# Altium PCB JacdacG0Button 40.PcbDoc
Units mm, origin at the board's own origin, x right, y up, seen from the top; angles counter-clockwise.
Board outline 12.5 x 25.85 mm, 2 copper layers (Top Layer, Bottom Layer), stack 1.525 mm thick; 22 components, 14 nets, 66 pads, 17 vias.
Unrouted connection lines stored in the file: 14.
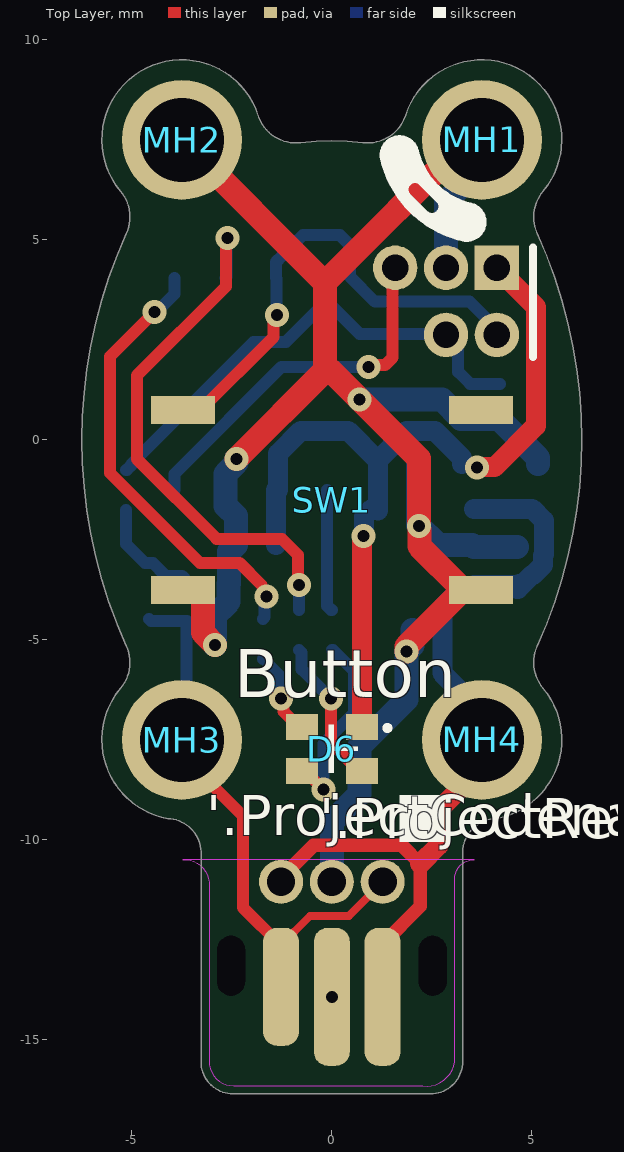
[diagram p0: Top Layer view]
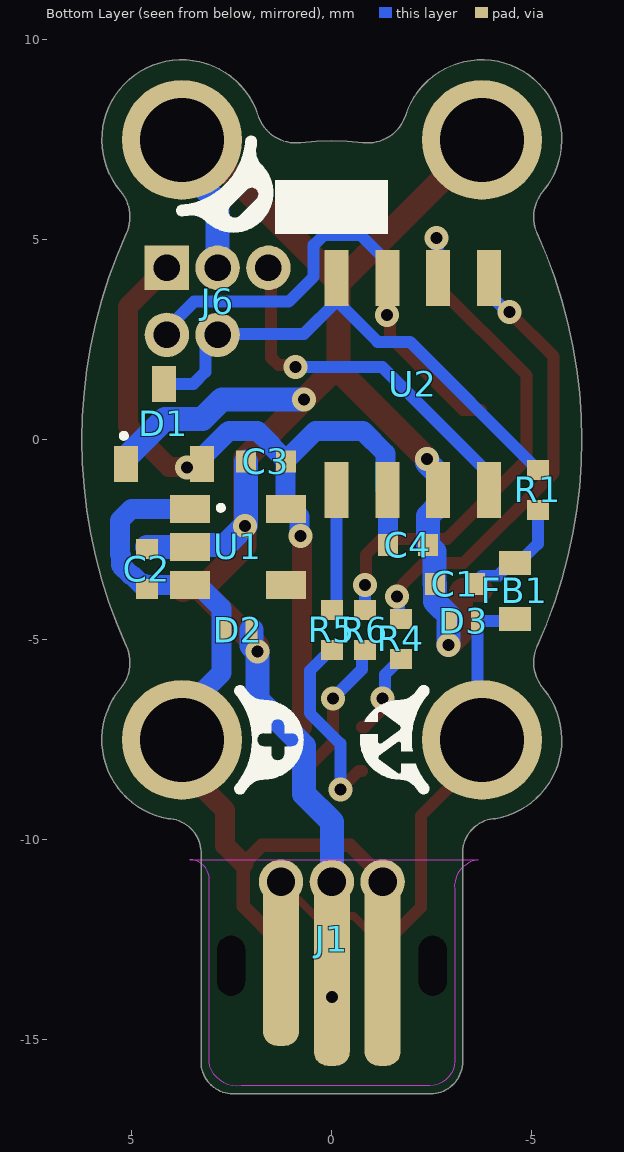
[diagram p1: Bottom Layer view, seen from below]

## Layer stack, top to bottom
Top Solder: solder mask 0.0102, Solder Resist, Dk 3.5
Top Layer: signal copper 0.0356
Dielectric 1: core 1.454, FR-4, Dk 4.2
Bottom Layer: signal copper 0.0356
Bottom Solder: solder mask 0.0102, Solder Resist, Dk 3.5

## Board outline
-3.27,-15.55 -3.27,-10.372 ccw(c-4.134,-10.334) -4.097,-9.47 cw(c-3.75,-7.5) -5.75,-7.5 -5.75,-7.471 cw(c-3.75,-7.5) -5.282,-6.214 ccw(c-6.047,-5.57) -5.136,-5.158 cw(c6.247,-0.001) -5.136,5.157 ccw(c-6.047,5.569) -5.281,6.212 cw(c-3.749,7.499) -1.845,8.113 ccw(c-0.893,8.42) -0.777,7.426 cw(c0.001,0.752) 0.778,7.426 ccw(c0.893,8.42) 1.845,8.113 cw(c3.749,7.499) 5.282,6.213 ccw(c6.047,5.57) 5.137,5.157 cw(c-6.25,0) 5.136,-5.158 ccw(c6.047,-5.571) 5.281,-6.214 cw(c3.75,-7.5) 4.097,-9.47 ccw(c4.134,-10.334) 3.27,-10.372 3.27,-15.55 cw(c2.471,-15.551) 2.47,-16.35 -2.47,-16.35 cw(c-2.471,-15.551)

## Design rules (kind name [scope] priority, off if disabled: settings)
AssemblyTestPointUsage [All] p1: valid=2
BoardOutlineClearance [All] p1: gap=0.3 ignorepadtopadclearanceinfootprint=FALSE except(0: Arc-SplitContinuation Track-SplitContinuation SMDPad-SplitContinuation THPad-SplitContinuation Via-SplitContinuation Fill-SplitContinuation Poly-SplitContinuation Region-OutlineEdge Region-SplitContinuation Text-OutlineEdge Text-SplitContinuation)
Clearance [All] p1: gap=0.125 ignorepadtopadclearanceinfootprint=FALSE except(0: Arc-Hole Track-Hole SMDPad-Hole THPad-Hole Via-Hole Fill-Hole Poly-Hole Region-Hole Text-Hole)
ComponentClearance [All] p1: gap=0.2 collisioncheckmode=3 verticalgap=0.2 showdistances=FALSE
DiffPairsRouting [All] p1: maxlimit=2 minlimit=0.15 mostfreqgap=0.15 toplayer_minwidth=0.15 toplayer_maxwidth=2 toplayer_prefwidth=0.15 bottomlayer_minwidth=0.15 bottomlayer_maxwidth=2 bottomlayer_prefwidth=0.15 substack1={CB9D278B-8BF5-444A-AAF4-837A2A9DF42D} toplayer_{cb9d278b-8bf5-444a-aaf4-837a2a9df42d}_minwidth=0.381 toplayer_{cb9d278b-8bf5-444a-aaf4-837a2a9df42d}_maxwidth=0.381 toplayer_{cb9d278b-8bf5-444a-aaf4-837a2a9df42d}_prefwidth=0.381 bottomlayer_{cb9d278b-8bf5-444a-aaf4-837a2a9df42d}_minwidth=0.381 bottomlayer_{cb9d278b-8bf5-444a-aaf4-837a2a9df42d}_maxwidth=0.381 bottomlayer_{cb9d278b-8bf5-444a-aaf4-837a2a9df42d}_prefwidth=0.381 substack2={826B8647-A721-4255-895A-19F9591B9CD1} toplayer_{826b8647-a721-4255-895a-19f9591b9cd1}_minwidth=0.381 toplayer_{826b8647-a721-4255-895a-19f9591b9cd1}_maxwidth=0.381 toplayer_{826b8647-a721-4255-895a-19f9591b9cd1}_prefwidth=0.381 bottomlayer_{826b8647-a721-4255-895a-19f9591b9cd1}_minwidth=0.381 bottomlayer_{826b8647-a721-4255-895a-19f9591b9cd1}_maxwidth=0.381 bottomlayer_{826b8647-a721-4255-895a-19f9591b9cd1}_prefwidth=0.381 substack3={E64FCAF4-1BC8-437D-B1E0-0E5F2DC0F59E} toplayer_{e64fcaf4-1bc8-437d-b1e0-0e5f2dc0f59e}_minwidth=0.381 toplayer_{e64fcaf4-1bc8-437d-b1e0-0e5f2dc0f59e}_maxwidth=0.381 toplayer_{e64fcaf4-1bc8-437d-b1e0-0e5f2dc0f59e}_prefwidth=0.381 bottomlayer_{e64fcaf4-1bc8-437d-b1e0-0e5f2dc0f59e}_minwidth=0.381 bottomlayer_{e64fcaf4-1bc8-437d-b1e0-0e5f2dc0f59e}_maxwidth=0.381 bottomlayer_{e64fcaf4-1bc8-437d-b1e0-0e5f2dc0f59e}_prefwidth=0.381 substack4={E61CE66C-507C-4E1E-8E83-C905434AFC1C} toplayer_{e61ce66c-507c-4e1e-8e83-c905434afc1c}_minwidth=0.381 toplayer_{e61ce66c-507c-4e1e-8e83-c905434afc1c}_maxwidth=0.381 toplayer_{e61ce66c-507c-4e1e-8e83-c905434afc1c}_prefwidth=0.381 bottomlayer_{e61ce66c-507c-4e1e-8e83-c905434afc1c}_minwidth=0.381 bottomlayer_{e61ce66c-507c-4e1e-8e83-c905434afc1c}_maxwidth=0.381 bottomlayer_{e61ce66c-507c-4e1e-8e83-c905434afc1c}_prefwidth=0.381 maxuncoupledlength=25
FabricationTestPointUsage [All] p1: valid=2 allowmultiple=FALSE
HoleSize [All] p1: absolutevalues=TRUE maxlimit=2.54 minlimit=0.2 maxpercent=80.000 minpercent=20.000
MinimumSolderMaskSliver [All] p1: minsoldermaskwidth=0.005
PlaneClearance [All] p1: clearance=0.3
PlaneConnect [All] p1: planeconnectstyle=Relief reliefexpansion=0.5 reliefentries=4 reliefconductorwidth=0.2 reliefairgap=0.3
PolygonConnect "PolygonConnect GND" [isVIA] p1: connectstyle=Relief reliefconductorwidth=0.2 reliefentries=4 polygonreliefangle="90 Angle" airgapwidth=0.2
PolygonConnect [All] p2: connectstyle=Relief reliefconductorwidth=0.2 reliefentries=4 polygonreliefangle="90 Angle" airgapwidth=0.2
RoutingVias [All] p1: holewidth=0.3 width=0.6 viastyle="Through Hole" minholewidth=0.3 minwidth=0.6 maxholewidth=0.3 maxwidth=0.8
SilkToSilkClearance [All] p1: silktosilkclearance=0.001
SilkToSolderMaskClearance [IsPad] p1: minsilkscreentomaskgap=0.05 clearancetoexposedcopper=TRUE
SolderMaskExpansion [All] p1: expansion=0.075 istentingtop=FALSE
Width [All] p1: maxlimit=2 minlimit=0.15 preferedwidth=0.15 substack1={CB9D278B-8BF5-444A-AAF4-837A2A9DF42D} substack2={826B8647-A721-4255-895A-19F9591B9CD1} substack3={E64FCAF4-1BC8-437D-B1E0-0E5F2DC0F59E} substack4={E61CE66C-507C-4E1E-8E83-C905434AFC1C} minimp=50.000000 maximp=50.000000 favimp=50.000000
20 further rules are at their usual default settings.

## Components (designator, comment, footprint, x,y, rotation, side; value= is the part's Value field where it differs from the comment)
C1 "CL05C330JB5NNNC" "C0402_0.55MM - without outline" -3.077,-3.6 r180 bottom
C2 "CL05A105KP5NNNC" "C0402_0.55MM - without outline" 4.625,-3.23 r270 bottom
C3 "CL05A105KP5NNNC" "C0402_0.55MM - without outline" 1.651,-0.541 r180 bottom
C4 "CL05A105KP5NNNC" "C0402_0.55MM - without outline" -1.9,-2.625 r0 bottom
D1 "BAT54S" "NXP-BAT54S-TO-236AB - WITHOUT OUTLINE" 4.2,0.4 r90 bottom
D2 "RCLAMP0521P-N" "TVS 0402 - without outline" 2.339,-4.75 r180 bottom
D3 "RCLAMP0521P-N" "TVS 0402 - without outline" -3.3,-4.525 r0 bottom
D6 "TZ-P4-1615RGBTCA1-0.55T" TZ-P4-1615RGBTCA1-0.55T 0,-7.725 r180 top
FB1 "TDK MPZ1608S102ATA00" "TDK MPZ1608 0.8mm - without outline" -4.575,-3.775 r90 bottom
J1 "Jacdac edge connector" JACDAC_EDGE_CONNECTOR_0.2mm_T&G 0,-10.5 r0 bottom
J6 "Hack Connect Mini 1.27 mm pitch 2-row" HACK_CONNECT_MINI_5_X_1_27 4.125,4.3 r270 bottom
MH1 "MH_5.0MMK_3.0MMC_2.1MMD_PTH" MH_5.0MMK_3.0MMC_2.1MMD_PTH 3.75,7.5 r180 top
MH2 "MH_5.0MMK_3.0MMC_2.1MMD_PTH" MH_5.0MMK_3.0MMC_2.1MMD_PTH -3.75,7.5 r0 top
MH3 "MH_5.0MMK_3.0MMC_2.1MMD_PTH" MH_5.0MMK_3.0MMC_2.1MMD_PTH -3.75,-7.5 r0 top
MH4 "MH_5.0MMK_3.0MMC_2.1MMD_PTH" MH_5.0MMK_3.0MMC_2.1MMD_PTH 3.75,-7.5 r0 top
R1 "RC0402FR-07220RL" "R0402 - Without outline" -5.15,-1.25 r270 bottom
R4 "RC0402FR-0730RL" "R0402 - Without outline" -1.725,-4.975 r90 bottom
R5 "RC0402FR-0730RL" "R0402 - Without outline" 0,-4.75 r90 bottom
R6 "RC0402FR-07150RL" "R0402 - Without outline" -0.825,-4.75 r90 bottom
SW1 "Tact Wurth 430152050826" "Wurth 430152050836 - medium" 0,-1.5 r0 top
U1 "LDO 3.3V/300 mA" "ON_SEMI-SOT23-5 - WITHOUT OUTLINE" 2.35,-2.675 r180 bottom
U2 "STM32G031J6M6" 8-SOIC -2.025,1.4 r90 bottom

## Footprints (in the part's own frame and the unit in brackets; to place one, negate y for a bottom-side part, rotate by r counter-clockwise, add the part's x,y. Pads: shape width x height; smd on the part's side, far side on the other; paste and mask are expansions set on the pad)
8-SOIC [mm] "8-SOIC (0.154\", 3.90mm Width)"
  rect 1.4x0.6 smd: 1(-2.65,1.905) 2(-2.65,0.635) 3(-2.65,-0.635) 4(-2.65,-1.905) 5(2.65,-1.905) 6(2.65,-0.635) 7(2.65,0.635) 8(2.65,1.905)
  body extent -2.96,-2.51 2.96,2.51, height 1.75
"C0402_0.55MM - without outline" [mm]
  rect 0.5x0.55 smd: 1(-0.5,0) 2(0.5,0)
  body extent -0.5,-0.25 0.5,0.25, height 0.55
HACK_CONNECT_MINI_5_X_1_27 [mm]
  rect 1.11x1.11 hole 0.66: 1(0,0)
  round 1.11 hole 0.66: 2(1.676,0) 3(0,1.27) 4(1.676,1.27) 5(0,2.54)
JACDAC_EDGE_CONNECTOR_0.2mm_T&G [mm] "JacDac 3 pin connector with traces for 0.2mm T&G"
  rrect78% 0.9x2.95 smd far side paste-1 mask+0: 1(-1.27,3.175)
  round 1.11 / inner round 0.71 / far side round 1.1 hole 0.71 paste-0.254 mask+0: 1(1.27,0.55) 2(0,0.55) 3(-1.27,0.55)
  rrect78% 0.9x4.3 smd paste-1 mask+0: 1(1.27,2.5)
  rrect78% 0.9x4.8 smd paste-1 mask+0: 2(0,2.75) 3(-1.27,2.75)
  rrect78% 0.9x3.45 smd far side paste-1 mask+0: 2(0,3.425) 3(1.27,3.425)
  round 0 hole 0.7 slot 1.5 at 90 deg unplated: ""(-2.52,2.65) ""(2.52,2.65)
  Top Layer keep-out region: -3.663,0 -3.413,0.079 -3.213,0.248 -3.092,0.48 -3.07,0.741 -3.07,0.741 -3.07,5.033 -2.987,5.341 -2.761,5.567 -2.453,5.65 -2.453,5.65 2.27,5.65 2.545,5.635 2.794,5.516 2.978,5.31 3.07,5.05 3.07,5.05 3.061,0.495 3.098,0.306 3.206,0.145 3.366,0.038 3.556,0 3.556,0
  Top Layer keep-out region: -3.663,0 -3.413,0.079 -3.213,0.248 -3.092,0.48 -3.07,0.741 -3.07,0.741 -3.07,5.033 -2.987,5.341 -2.761,5.567 -2.453,5.65 -2.453,5.65 2.27,5.65 2.545,5.635 2.794,5.516 2.978,5.31 3.07,5.05 3.07,5.05 3.061,0.495 3.098,0.306 3.206,0.145 3.366,0.038 3.556,0 3.556,0
  Bottom Layer lines w0.2: -1.307,2.167 -1.28,2.14 -0.54,1.4 0.426,1.4 1.126,0.7 ; -1.27,0.85 -1.126,0.85 ; -1.067,2.153 -1.067,2.077
  Bottom Layer lines w0.34: -1.27,0.454 -0.457,-0.359 1.753,-0.359 2.21,0.098 2.21,1.165 1.283,2.092
  Bottom Layer keep-out region: -3.731,0 -3.494,0.027 -3.285,0.142 -3.136,0.329 -3.07,0.559 -3.07,0.559 -3.07,5.033 -3.023,5.269 -2.889,5.469 -2.689,5.603 -2.453,5.65 -2.453,5.65 2.27,5.65 2.545,5.635 2.794,5.516 2.978,5.31 3.07,5.05 3.07,5.05 3.07,0.487 3.107,0.301 3.213,0.143 3.371,0.037 3.557,0 3.557,0
MH_5.0MMK_3.0MMC_2.1MMD_PTH [mm] "Mounting Hole 5.0mm clearance, 3.1 annualar ring and 2.1mm PTH"
  round 3 hole 2.1 mask+0.05: 1(0,0)
"NXP-BAT54S-TO-236AB - WITHOUT OUTLINE" [mm] "SOT23, 3-Leads, Body 2.90x2.30mm, Pitch 0.95mm, IPC Medium Density"
  rect 0.9x0.6 smd: 1(-1,0.95) 2(-1,-0.95) 3(1,0)
  silkscreen extent -0.35,0.95 -0.25,1.05, body extent -1.32,-1.5 1.32,1.5, height 1.12
"ON_SEMI-SOT23-5 - WITHOUT OUTLINE" [mm]
  rect 1x0.7 smd: 1(-1.2,0.95) 2(-1.2,0) 3(-1.2,-0.95) 4(1.2,-0.95) 5(1.2,0.95)
  silkscreen extent -0.48,0.93 -0.38,1.02, body extent -1.5,-1.57 1.5,1.58, height 1.1
"R0402 - Without outline" [mm]
  rect 0.5x0.55 smd: 1(-0.5,0) 2(0.5,0)
  body extent -0.5,-0.25 0.5,0.25, height 0.35
"TDK MPZ1608 0.8mm - without outline" [mm]
  rect 0.6x0.8 smd paste-0.1: 1(-0.7,0) 2(0.7,0)
  body extent -0.8,-0.4 0.8,0.4, height 0.8
"TVS 0402 - without outline" [mm] "TVS 0402 RoHS"
  rect 0.3x0.55 smd mask+0.05: 1(-0.325,0) 2(0.325,0)
  body extent -0.5,-0.3 0.5,0.3, height 0.5
TZ-P4-1615RGBTCA1-0.55T [mm] "1615 Light Emitting Diodes (LED) RoHS"
  rect 0.8x0.65 smd mask+0.05: 1(-0.75,-0.55) 2(-0.75,0.55) 3(0.75,0.55) 4(0.75,-0.55)
  silkscreen extent -1.44,-0.6 0.07,0.6, body extent -0.8,-0.75 0.8,0.75, height 0.55
"Wurth 430152050836 - medium" [mm] "6*6mm vertical type, SMD, height 5.0mm, black actuator, 160gf, T&R"
  rect 1.6x0.7 smd: 1(-3.725,2.25) 2(-3.725,-2.25) 3(3.725,2.25) 4(3.725,-2.25)
  body extent -4.5,-3.1 4.5,3.1, height 4.99

## Part data
C1: "CAP CER 33PF 50V C0G/NP0 0402", Capacitance=33pF, Case Code (Imperial)=0402, Case Code (Metric)=1005, Dielectric=C0G, Manufacturer=Samsung, Max Operating Temperature=125°C, Min Operating Temperature=-55°C, Package Quantity=1, Supplier Part Number 1=1276-1272-1-ND, Temperature Coefficient=300ppm/°C, Tolerance=5%, Voltage=50V, Case/Package=0402, Category="Ceramic Capacitors", ComponentLink1Description="Online datasheet", ComponentLink1URL=https://datasheet.ciiva.com/15195/getdatasheetpartid-355282-15195687.pdf, Construction=Flat, Contact Plating=Tin, Depth=0.5mm, Height=0.5mm, Lead Free="Lead Free", Length=1mm, Manufacturer Part Number=CL05C330JB5NNNC, Material=Ceramic, Mount="Surface Mount", Packaging="Tape and Reel", Pricing 1="1=0.10000, 10=0.02300, 50=0.01260, 100=0.01040, 500=0.00740, 1000=0.00582, 2500=0.00529, 5000=0.00487 (USD)", Pricing 2="1=0.12500, 25=0.02900, 100=0.01300, 250=0.01100, 500=0.00900, 1000=0.00600 (USD)", Pricing 3="1=0.10000, 10=0.01400, 50=0.01400, 100=0.01100, 1000=0.00600, 10000=0.00400 (USD)", Pricing 4="150=0.01120, 500=0.00860, 2500=0.00640, 5000=0.00550 (GBP)", Radiation Hardening=No, RoHS=Yes, RoHS Compliant=Yes, Series=CL, Stock 1=5436088, Stock 2=45340, Stock 3=8877, Stock 4=10934, Supplier 1=Digi-Key, Supplier 2=Newark, Supplier 3=Mouser, Supplier 4=Farnell, Supplier Part Number 2=82AC9259, Supplier Part Number 3=187-CL05C330JB5NNNC, Supplier Part Number 4=3013373RL, Thickness=0.022inch, Voltage Rating=50V, Voltage Rating (DC)=50V, Width=0.02inch
C2 C3 C4: "CAP CER 1UF 10V X5R 0402", Capacitance=1µF, Case Code (Imperial)=0402, Case Code (Metric)=1005, Dielectric=X5R, Manufacturer=Samsung, Max Operating Temperature=85°C, Min Operating Temperature=-55°C, Package Quantity=1, Supplier Part Number 1=1276-1076-1-ND, Tolerance=10%, Voltage Rating=10V, Case/Package=0402, Category=Capacitors, Checked=?, ComponentLink1Description="Online datasheet", ComponentLink1URL=https://datasheet.ciiva.com/15195/getdatasheetpartid-358390-15195630.pdf, Contact Plating=Tin, Created=DG, Depth=0.5mm, Height=0.5mm, Length=1mm, Manufacturer Part Number=CL05A105KP5NNNC, Material=Ceramic, Mount="Surface Mount", Packaging="Tape and Reel", Pricing 1="1=0.10000, 10=0.03900, 50=0.02100, 100=0.01720, 500=0.01228, 1000=0.00965, 2500=0.00877, 5000=0.00807 (USD)", Pricing 2="1=0.10000, 10=0.04200, 100=0.01800, 500=0.01300, 1000=0.01000, 2500=0.00900 (USD)", Pricing 3="10=0.02450, 100=0.02000, 500=0.01310, 2500=0.00920, 5000=0.00810, 10000=0.00640, 50000=0.00490 (GBP)", Radiation Hardening=No, RoHS=Yes, Stock 1=5705569, Stock 2=928941, Stock 3=53670, Supplier 1=Digi-Key, Supplier 2=Mouser, Supplier 3=Farnell, Supplier Part Number 2=187-CL05A105KP5NNNC, Supplier Part Number 3=3013329, Thickness=0.022inch, Width=0.02inch
D1: "DIODE ARRAY SCHOTTKY 30V SOT23", Manufacturer=Nexperia, Manufacturer Part Number=BAT54S,235, Supplier Part Number 1=1727-1868-1-ND, Category="Rectifier Diodes", ComponentLink1Description="NXP datasheet online", ComponentLink1URL=https://assets.nexperia.com/documents/data-sheet/BAT54_SER.pdf, Pricing 1="1=0.13000, 10=0.11900, 100=0.05610, 500=0.03326, 1000=0.02185, 5000=0.02138 (USD)", RoHS=No, Stock 1=14011, Supplier 1=Digi-Key, Supplier 2=Mouser, Supplier 3=RSComponents, Supplier Part Number 2=771-BAT54S235, Supplier Part Number 3=1707990
D2 D3: "Bidirectional 5V (Max) 6V 16V 3.5A (8/20us) 0402 TVS RoHS", Manufacturer="Born Semiconductor", Package=0402, Supplier1 Part Number=C316043, Checked By=?, ComponentLink1Description="Online datasheet", ComponentLink1URL=https://datasheet.lcsc.com/szlcsc/Bourne-Semicon-Shenzhen-RCLAMP0521P-N_C316043.pdf, Created By="D Gakure", Manufacturer Part Number=RCLAMP0521P-N, Supplier1=LCSC
D6: "1615 Light Emitting Diodes (LED) RoHS", Manufacturer=TUOZHAN, Package=1615, Supplier 1 Part Number=C779813, Category=Optoelectronics, Checked By=?, ComponentLink1Description="Online datasheet", ComponentLink1URL=https://datasheet.lcsc.com/szlcsc/2009041238_TUOZHAN-TZ-P4-1615RGBTCA1-0-55T_C779813.pdf, Created By="D. Gakure", Manufacturer Part Number=TZ-P4-1615RGBTCA1-0.55T, Packaging="Tape & Reel (TR)", RoHS="RoHS Compliant", Size / Dimension=1.6x1.5mm, Supplier 1=LCSC
FB1: "0603 1k@100MHz 0.8A chip", Case Code (Imperial)=0603, Case Code (Metric)=1608, Current Rating=800mA, DC Resistance (DCR)=300mR, Manufacturer=TDK, Manufacturer Part Number=MPZ1608S102ATA00, Package Quantity=4000, Supplier Part Number 1=445-8694-1-ND, Tolerance=25%, Case/Package=0603, ComponentLink2Description="datasheet online", ComponentLink2URL=https://www.mouser.co.uk/datasheet/2/400/eads_commercial_power_mpz1608_en-923650.pdf, ComponentLink3Description=datasheet, ComponentLink3URL="Y:\System\Altium\Libraries 2014\TDK\Datasheets\eads_commercial_power_mpz1608_en-923650.pdf", Core Material=Ferrite, Height=0.037inch, Impedance="1kR @ 100MHz", Length=0.063inch, Max DC Current=800mA, Mount="Surface Mount", Packaging="Tape and Reel", Pricing 1="1=0.1, 10=0.079, 25=0.0716, 50=0.0644, 100=0.0472, 250=0.03432, 500=0.03146, 1000=0.02717 (USD)", Stock 1=113542, Supplier 1=Digi-Key, Supplier 2=Mouser, Supplier Part Number 2=810-MPZ1608S102ATA00, Width=0.031inch
J1: "3 pin Jacdac edge connector 1.27mm pitch", Manufacturer Part Number=JACDAC_EDGE_CONNECTOR, Checked By=?, ComponentLink1Description="Yuliang JACDAC cable connector drawing online", ComponentLink1URL=https://github.com/microsoft/jacdac-mdk/blob/main/connector/JACDAC-Connector-by-Yuliang-2020-11-28.pdf, ComponentLink2Description="JACDAC PCB edge connector spec onlin", ComponentLink2URL=https://github.com/microsoft/jacdac-mdk/blob/main/connector/JACDAC_PCB_Edge_Connector_Drawing_JD-PEC-01_rev_01.pdf, Created By="D. Gakure", PCB Type="1.6mm FR4"
J6: library part HACK_CONNECT_MINI
MH1 MH2 MH3 MH4: "Mounting Hole 5.0mm keepout, 3.0mm annualar ring and 2.1mm Drill PTH"
R1: "RES SMD 220 OHM 1% 1/16W 0402", Case Code (Imperial)=0402, Case Code (Metric)=1005, Manufacturer=Yageo, Max Operating Temperature=155°C, Max Power Dissipation=63mW, Min Operating Temperature=-55°C, Package Quantity=1, Power Rating=62.5mW, Resistance=220R, Resistor Type="Thick Film", Supplier Part Number 1=311-220LRCT-ND, Temperature Coefficient=100ppm/°C, Tolerance=1%, Voltage Rating=50V, Case/Package=0402, Category=Resistors, Checked=?, ComponentLink1Description=https://datasheet.ciiva.com/11819/0900766b80c66297-11819466.pdf?src-supplier=RSComponents, ComponentLink1URL=https://datasheet.ciiva.com/11819/0900766b80c66297-11819466.pdf?src-supplier=RSComponents, ComponentLink2Description=https://datasheet.ciiva.com/2453/pyu-r-int-thick-7-2453460.pdf?src-supplier=Digi-Key, ComponentLink2URL=https://datasheet.ciiva.com/2453/pyu-r-int-thick-7-2453460.pdf?src-supplier=Digi-Key, ComponentLink3Description=https://datasheet.ciiva.com/2453/pyu-r-int-thick-7-2453461.pdf?src-supplier=Digi-Key, ComponentLink3URL=https://datasheet.ciiva.com/2453/pyu-r-int-thick-7-2453461.pdf?src-supplier=Digi-Key, ComponentLink4Description=https://datasheet.ciiva.com/2453/pyu-r-int-thick-7-2453462.pdf?src-supplier=Digi-Key, ComponentLink4URL=https://datasheet.ciiva.com/2453/pyu-r-int-thick-7-2453462.pdf?src-supplier=Digi-Key, ComponentLink5Description=https://datasheet.ciiva.com/16746/pyu-rc0402-51-rohs-l-6-r-16746831.pdf?src-supplier=Future+Electronics, ComponentLink5URL=https://datasheet.ciiva.com/16746/pyu-rc0402-51-rohs-l-6-r-16746831.pdf?src-supplier=Future+Electronics, Created=D.G, Depth=0.5mm, Features="Moisture Resistant", Height=0.016inch, Lead Free="Lead Free", Length=1mm, Manufacturer Part Number=RC0402FR-07220RL, Military Standard=Not, Number of Pins=2, Number of Terminations=2, Packaging="Tape and Reel", Pricing 1="1=0.10000, 10=0.01400, 100=0.00580, 1000=0.00262, 2500=0.00228, 5000=0.00188 (USD)", Pricing 2="1=0.10000, 10=0.01200, 100=0.00400, 1000=0.00400, 2500=0.00400, 10000=0.00300 (USD)", Pricing 3="1=0.08130, 25=0.01210, 100=0.01120, 250=0.01030, 500=0.00900 (GBP)", REACH SVHC="No SVHC", RoHS=Yes, Stock 1=1286042, Stock 2=324625, Stock 3=18234, Supplier 1=Digi-Key, Supplier 2=Mouser, Supplier 3=Farnell, Supplier Part Number 2=603-RC0402FR-07220RL, Supplier Part Number 3=2147864, Termination=SMD/SMT, Voltage Rating (DC)=50V, Width=0.02inch
R4 R5: "RES SMD 30 OHM 1% 1/16W 0402", Case Code (Imperial)=0402, Case Code (Metric)=1005, Manufacturer=Yageo, Max Operating Temperature=155°C, Max Power Dissipation=63mW, Min Operating Temperature=-55°C, Resistance=30R, Resistance Tolerance=1%, Resistor Type="Thick Film", Supplier Part Number 1=311-30LRCT-ND, Temperature Coefficient=100ppm/°C, Voltage Rating=50V, Case/Package=0402, Category="Chip SMD Resistors", Checked By=?, ComponentLink1Description="Online datasheet", ComponentLink1URL=https://datasheet.ciiva.com/7849/1018594-7849958.pdf, Construction=Rectangular, Contact Plating=Tin,Matte, Created By="D. Gakure", Depth=0.5mm, Features="Moisture Resistant", Height=0.35mm, Lead Free="Lead Free", Length=1mm, Manufacturer Part Number=RC0402FR-0730RL, Military Standard=Not, Number of Terminations=2, Packaging="Tape and Reel", Power Rating=63mW, Pricing 1="1=0.10000, 10=0.01400, 100=0.00580, 1000=0.00260, 2500=0.00226, 5000=0.00186 (USD)", Pricing 2="1=0.10000, 10=0.01200, 50=0.01200, 100=0.00400, 1000=0.00400, 10000=0.00300 (USD)", Pricing 3="10=0.01210, 100=0.00420, 500=0.00370, 2500=0.00280, 5000=0.00250, 10000=0.00230, 50000=0.00150 (GBP)", REACH SVHC=Unknown, RoHS=Yes, RoHS Compliant=Yes, Series=RC, Size Code=0402, Stock 1=2973, Stock 2=41804, Stock 3=4422, Supplier 1=Digi-Key, Supplier 2=Mouser, Supplier 3=Farnell, Supplier Part Number 2=603-RC0402FR-0730RL, Supplier Part Number 3=1458775, Termination=SMD/SMT, Tolerance=1%, Voltage Rating (DC)=50V, Width=0.5mm
R6: "RES SMD 150 OHM 1% 1/16W 0402", Case Code (Imperial)=0402, Case Code (Metric)=1005, Manufacturer=Yageo, Max Operating Temperature=155°C, Max Power Dissipation=63mW, Min Operating Temperature=-55°C, Package Quantity=1, Power Rating=62.5mW, Resistance=150R, Resistance Tolerance=1%, Resistor Type="Thick Film", Supplier Part Number 1=311-150LRCT-ND, Temperature Coefficient=100ppm/°C, Voltage Rating=50V, Case/Package=0402, Category="Chip SMD Resistors", Checked By=?, ComponentLink1Description="ine datasheet", ComponentLink1URL=https://datasheet.ciiva.com/11808/0900766b80c66297-11808422.pdf, Construction=Rectangular, Created By="D. Gakure", Depth=0.5mm, Features="Moisture Resistant", Height=0.016inch, Lead Free="Lead Free", Length=1mm, Manufacturer Part Number=RC0402FR-07150RL, Military Standard=Not, Number of Terminations=2, Packaging="Tape and Reel", Pricing 1="1=0.10000, 10=0.01400, 100=0.00580, 1000=0.00260, 2500=0.00226, 5000=0.00186 (USD)", Pricing 2="1=0.10000, 10=0.01200, 50=0.01200, 100=0.00400, 1000=0.00400, 10000=0.00300 (USD)", Pricing 3="10000=0.00270, 50000=0.00200 (GBP)", REACH SVHC="No SVHC", RoHS=Yes, RoHS Compliant=Yes, Series=RC, Stock 1=5214533, Stock 2=582717, Stock 3=880000, Supplier 1=Digi-Key, Supplier 2=Mouser, Supplier 3=Farnell, Supplier Part Number 2=603-RC0402FR-07150RL, Supplier Part Number 3=2421893, Technology="THICK FILM", Termination=SMD/SMT, Tolerance=1%, Width=0.02inch, Working Voltage=50V
SW1: "6x6mm SPST 0.05A 12VDC SMD 260gf", Contact Current Rating=50mA, Manufacturer="Wurth Electronics", Manufacturer Part Number=430152050826, Max Operating Temperature=85°C, Min Operating Temperature=-40°C, Operating Force=260gf, Supplier Part Number 1=732-6993-1-ND, Actuator Length=1.6mm, Actuator Material="Polymer,Liquid Crystal Polymer", Actuator Type=Standard, ComponentLink1Description="wurth datasheet online", ComponentLink1URL=http://www.farnell.com/datasheets/1910150.pdf?src-supplier=Element14, ComponentLink2Description="wurth datasheet", ComponentLink2URL="Y:\System\Altium\Libraries 2014\Wurth\Datasheets\4301x2xxx8x6 1910150.pdf", Contact Material="Stainless Steel,Steel", Current Rating=50mA, Height=5mm, Illumination Type=Non-Illuminated,Illuminated, Length=6.2mm, Mechanical Life=200000Cycles, Mount="Surface Mount", Packaging="Tape and Reel", Pricing 1="1=0.47, 500=0.38232 (USD)", REACH SVHC="No SVHC", Stock 1=2282, Supplier 1=Digi-Key, Supplier 2=Farnell, Supplier 3=RSComponents, Supplier Part Number 2=2065110, Supplier Part Number 3=7856213, Switch Function=Off-Mom, Switch Travel=0.25mm, Termination="Gull Wing", Throw Configuration=SPST, Width=6.2mm
U1: library part NCP114ASN330T1G, "ON SEMICONDUCTOR - NCP114ASN330T1G - LDO Voltage Regulator, Fixed, 1.7 V to 5.5 V in, 3.3 V/300 mA out, 150 mV drop, TSOP-5", Case/Package=SOT-23-5, Dropout Voltage=225mV, Manufacturer="ON Semiconductor", Max Input Voltage=5.5V, Max Operating Temperature=85°C, Min Operating Temperature=-40°C, Min Output Voltage=3.3V, Output Current=300mA, Power Supply Rejection Ratio (PSRR)=75dB, Quiescent Current=95uA, Supplier Part Number 1=NCP114ASN330T1GOSCT-ND, Category="Voltage Regulators - Linear", Checked=?, ComponentLink3Description="On Semi datasheet online", ComponentLink3URL=http://www.onsemi.com/pub/Collateral/NCP114-D.PDF, Created=DG, Lead Free="Lead Free", Manufacturer Part Number=NCP114ASN330T1G, Mount="Surface Mount", Number of Regulators=1, Output Configuration=Positive, Output Type=Fixed, Packaging="Cut Tape", Pricing 1="1=0.33000, 10=0.24900, 25=0.21760, 100=0.12440, 250=0.11664, 500=0.09330, 1000=0.07153 (USD)", RoHS=No, Stock 1=32529, Supplier 1=Digi-Key, Supplier 2=RSComponents, Supplier 3=Mouser, Supplier Part Number 2=1263178, Supplier Part Number 3=863-NCP114ASN330T1G
U2: "MCU 32-bit ARM Cortex M0+ RISC 32KB Flash 2.5V/3.3V 8-Pin SO N Tube", Manufacturer=STMicroelectronics, Supplier Part Number 1=497-19552-ND, Category=Microcontrollers, Checked By=?, ComponentLink1Description="Online datasheet", ComponentLink1URL=https://www.st.com/resource/en/datasheet/stm32g031c6.pdf, Created By="D. Gakure", Manufacturer Part Number=STM32G031J6M6, Pricing 1="1=1.80000, 10=1.61600, 25=1.52480, 100=1.29920, 250=1.21992, 500=1.06744, 1000=0.88952 (USD)", Pricing 2="1=1.91000, 25=1.70000, 75=1.63000, 150=1.59000, 400=1.53000 (USD)", Pricing 3="1=1.50000, 10=1.28000, 50=1.28000, 100=1.09000, 1000=0.73700, 10000=0.71100 (USD)", RoHS=Yes, Supplier 1=Digi-Key, Supplier 2="Future Electronics", Supplier 3=Mouser, Supplier Part Number 2=2116576, Supplier Part Number 3=511-STM32G031J6M6

## Via types
v1: diameter 0.6, hole 0.3, Top Layer to Bottom Layer, tented both sides, 17 vias

## Nets (pads, with @x,y where several pads share a name; then routed paths per layer and width w, separated by ;. In a path a pad name is that pad's centre, name@x,y a point inside that pad or via, vN(x,y) a via of type N, cw(c..) or ccw(c..) an arc to the next point about the centre after c; other vN are vias at no path point)
3V3: C3.2 C4.2 D1.2 D6.1 J6.1 U1.5 U2.2 | length 21.3
  Top Layer w0.5: D6.1 0.75,-2.466 0.786,-2.43 v1(0.786,-2.403) ; v1(3.624,-0.699) 3.643,-0.68 4.07,-0.68 5.1,0.35 5.1,3.325 J6.1
  Bottom Layer w0.5: C4.2 -1.4,-1.26 U2.2 ; U2.2@-1.34,-1.25 -1.34,-0.341 -0.774,0.225 0.411,0.225 C3.2@1.151,-0.516 ; v1@0.786,-2.376 0.805,-2.357 0.805,-1.92 1,-1.725 U1.5 ; C3.2@1.151,-0.566 1.158,-0.572 U1.5@1.158,-1.77 ; C3.2 C3.2@1.151,-0.516 ; D1.2 3.25,-0.45 2.575,0.225 1.862,0.225 1.505,-0.132 1.505,-0.162 C3.2@1.151,-0.516
BUTTON/SWDIO: J6.2 SW1.1 U2.7 | length 12.4
  Top Layer w0.3: SW1.1 -3.275,0.75 -1.458,2.567 -1.458,2.956 -1.375,3.039 v1(-1.375,3.12)
  Bottom Layer w0.3: v1(-1.375,3.12) -1.383,3.127 -1.383,4.032 -1.395,4.045 -1.395,4.445 -1.24,4.6 -0.725,5.115 0.204,5.115 0.455,4.864 0.455,4.076 1.077,3.454 3.445,3.454 J6.2@4.275,2.624
GND: C1.1 C2.1 C3.1 C4.1 D1.1 D2.2 D3.2 J1.2 J6.3 MH1.1 MH2.1 SW1.2 SW1.4 U1.2 U2.3 | length 52.4
  Top Layer w0.6: MH2.1 -0.172,3.922 ; SW1.2 -3.275,-3.75 -3.225,-3.8 -3.225,-4.825 v1(-2.923,-5.127) ; v1(-2.384,-0.484) -0.151,1.749 -0.048,1.749 v1(0.698,1.004) 2.175,-0.474 v1(2.175,-2.15) ; -0.172,1.728 -0.172,3.922 ; v1(1.862,-5.289) 1.862,-5.163 3.225,-3.8 SW1.4@3.225,-3.7 ; v1@2.187,-2.239 2.187,-2.662 SW1.4@3.225,-3.7 ; SW1.4 3.675,-3.7 SW1.4@3.225,-3.7 ; MH1.1 3.399,7.5 -0.172,3.929 -0.172,3.922
  Bottom Layer w0.6: D3.2 -2.975,-4.446 -2.577,-4.049 C1.1 ; v1(-2.923,-5.127) D3.2@-2.923,-4.587 ; C1.1@-2.567,-3.59 -2.567,-2.792 C4.1 -2.4,-1.91 -2.66,-1.65 -2.66,-0.85 -2.384,-0.574 v1(-2.384,-0.484) ; J1.2@0,-11.05 0,-9.551 0.698,-8.853 0.698,-7.653 1.862,-6.489 v1(1.862,-5.289) 2.014,-5.138 D2.2 ; v1@0.775,1.004 2.751,1.004 3.23,0.525 4.175,0.525 5.15,-0.45 D1.1 ; C3.1 2.151,-2.126 2.65,-2.625 3.5,-2.625 U1.2 C2.1@4.625,-2.675 ; J6.3 2.855,5.956 3.75,6.851 MH1.1
  other v1: 0,-13.925
JD_DATA: D3.1 FB1.1 J1.1 MH3.1 | length 11.2
  Top Layer w0.3: MH3.1 -3.75,-7.875 -2.225,-9.4 -2.225,-11.695 -1.28,-12.64 -1.27,-12.65 J1.1@-1.27,-13.675
  Bottom Layer w0.3: FB1.1 -4.525,-4.525 D3.1 ; MH3.1 -3.637,-7.387 D3.1@-3.637,-4.525
JD_DATA_MCU/SWCLK: D1.3 J6.4 R1.1 U2.8 | length 13
  Bottom Layer w0.3: R1.1 -5.125,-0.75 -5.025,-0.65 -5.025,-0.625 -1.953,2.447 -1.146,2.447 -0.12,3.473 U2.8@-0.12,3.5 ; U2.8 -0.12,3.65 -0.12,3.463 0.698,2.645 2.984,2.645 3.16,2.469 3.16,1.699 3.459,1.4 D1.3
JD_PWR: C2.2 D2.1 J1.3 MH4.1 U1.1 U1.3 | length 13.5
  Top Layer w0.34: MH4.1@3.75,-8.176 MH4.1
  Top Layer w0.5: 2.21,-10.598 2.667,-10.141 2.667,-9.259 MH4.1@3.75,-8.176
  Bottom Layer w0.5: U1.1 5.007,-1.725 5.3,-2.018 5.3,-2.869 5.275,-2.894 5.275,-3.135 5.034,-3.376 5.004,-3.376 4.65,-3.73 C2.2 ; MH4.1 3.75,-6.824 2.763,-5.837 2.763,-4.206 3.244,-3.725 3.45,-3.725 U1.3 4.65,-3.625 C2.2@4.675,-3.6
JD_RGB_B: R4.2 U2.5 | length 11.1
  Top Layer w0.3: v1(-4.438,3.19) -5.541,2.086 -5.541,-0.834 -3.298,-3.077 -2.309,-3.077 -1.762,-3.625
  Bottom Layer w0.3: v1(-4.438,3.19) -4.39,3.19 -3.93,3.65 U2.5 ; R4.2 -1.68,-4.43 -1.68,-3.968 v1(-1.635,-3.923)
JD_RGB_G: R5.2 U2.1 | length 3.1
  Bottom Layer w0.3: U2.1 -0.12,-4.15 -0.02,-4.25 R5.2
JD_RGB_R: R6.2 U2.6 | length 13.9
  Top Layer w0.3: v1(-2.613,5.045) -2.65,5.008 -2.65,3.829 -4.87,1.609 -4.87,-0.484 -2.879,-2.475 -1.25,-2.475 -0.85,-2.875 -0.85,-3.6 v1(-0.825,-3.625)
  Bottom Layer w0.3: U2.6 -2.637,4.073 -2.637,5.021 v1(-2.613,5.045) ; R6.2 v1(-0.825,-3.625)
NetC1_2: C1.2 FB1.2 R1.2 | length 2.9
  Bottom Layer w0.2: R1.2@-5.175,-1.775 R1.2
  Bottom Layer w0.3: R1.2 -5.15,-2.6 -4.675,-3.075 FB1.2 -4.475,-3.075 -4.325,-3.225 -4.325,-3.23 -4.149,-3.406 -3.747,-3.406 -3.577,-3.575 C1.2
NetD6_2: D6.2 R6.1 | length 3.7
  Top Layer w0.3: v1(-0.026,-6.468) -0.026,-7.574 0.675,-8.275 D6.2
  Bottom Layer w0.3: R6.1 -0.754,-5.321 -0.754,-5.74 v1(-0.026,-6.468)
NetD6_3: D6.3 R5.1 | length 4.8
  Top Layer w0.3: D6.3 -0.675,-8.275 -0.214,-8.736 v1(-0.214,-8.739)
  Bottom Layer w0.3: v1(-0.214,-8.739) -0.214,-7.598 0.549,-6.835 0.549,-5.774 0.025,-5.25 R5.1
NetD6_4: D6.4 R4.1 | length 2.2
  Top Layer w0.3: v1(-1.27,-6.468) -1.213,-6.526 -1.213,-6.787 -0.825,-7.175 D6.4
  Bottom Layer w0.3: R4.1 -1.7,-5.475 -1.6,-5.575 -1.6,-5.6 -1.327,-5.873 -1.327,-6.411 v1(-1.27,-6.468)
nRESET: J6.5 U2.4 | length 9.3
  Top Layer w0.2: J6.5@1.961,4.362 J6.5@1.963,4.363
  Top Layer w0.3: v1(0.914,1.819) 0.959,1.864 1.329,1.864 1.521,2.056 1.521,4.236 J6.5
  Bottom Layer w0.3: U2.4 -3.93,-0.85 -1.261,1.819 v1(0.914,1.819)
pads on no net: J1. SW1.3 U1.4

## Silkscreen, mask and mechanical layers (free items; w line width, h text height)
Top Overlay:
  drawing of 2 lines, arcs and shapes, not listed
  text "Button" at -2.438,-6.44 h1.2
  text "'.ProjectCodenameID'-" at -3.136,-9.893 h1
  text "'.ProjectRevision'" at -0.311,-9.965 h1
Bottom Overlay:
  drawing of 4 lines, arcs and shapes, not listed
Dimension:
  the board outline again, w0.05
Board Outline:
  the board outline again, w0.2
Top Assy:
  the board outline again, w0.05
Bottom Assy:
  the board outline again, w0.05

## Dimensions
2.47,-16.35 to -3.749,9.5 on Dimension
-2.47,-16.35 to -0.777,7.426 on Dimension
-6.25,-0.001 to 6.25,0 on Dimension
-5.75,-7.5 to 5.75,-7.5 on Dimension
-3.27,-15.55 to 3.27,-15.55 on Dimension

## Text inside footprints (layer, text, board x,y; h text height)
J1: Alignment "board outline  / for 'innie'" at 4.736,-10.9 h1.2; Alignment "board outline  / for 'outie'" at 4.511,-13.15 h1.2; Mechanical 9 "JACDAC  / cable connector  / body" at -4.846,-21.675 h1.7 r180; Bottom Courtyard "board outline  / for 'outie'" at 5.261,-9.9 h1.2
MH1: Assembly Notes "5mm dia keepout  / for traces and  / components to  / allow space for  / bushes/standoffs/ / nuts/screw heads" at -8.5,7.95 h0.5; Assembly Notes "board outline can  / be on 2.0mm   / radius if necessary" at -8.5,3.375 h0.5